# Altium PCB ADCS C2Sv0.1.PcbDoc (part 3 of 3)
Units mm, origin at the board's own origin, x right, y up, seen from the top; angles counter-clockwise.
Board outline 90 x 68 mm, 6 copper layers (SIG 1, GND 1, SIG 2, PWR, GND 2, SIG 3), stack 1.597 mm thick; 158 components, 104 nets, 588 pads, 339 vias.
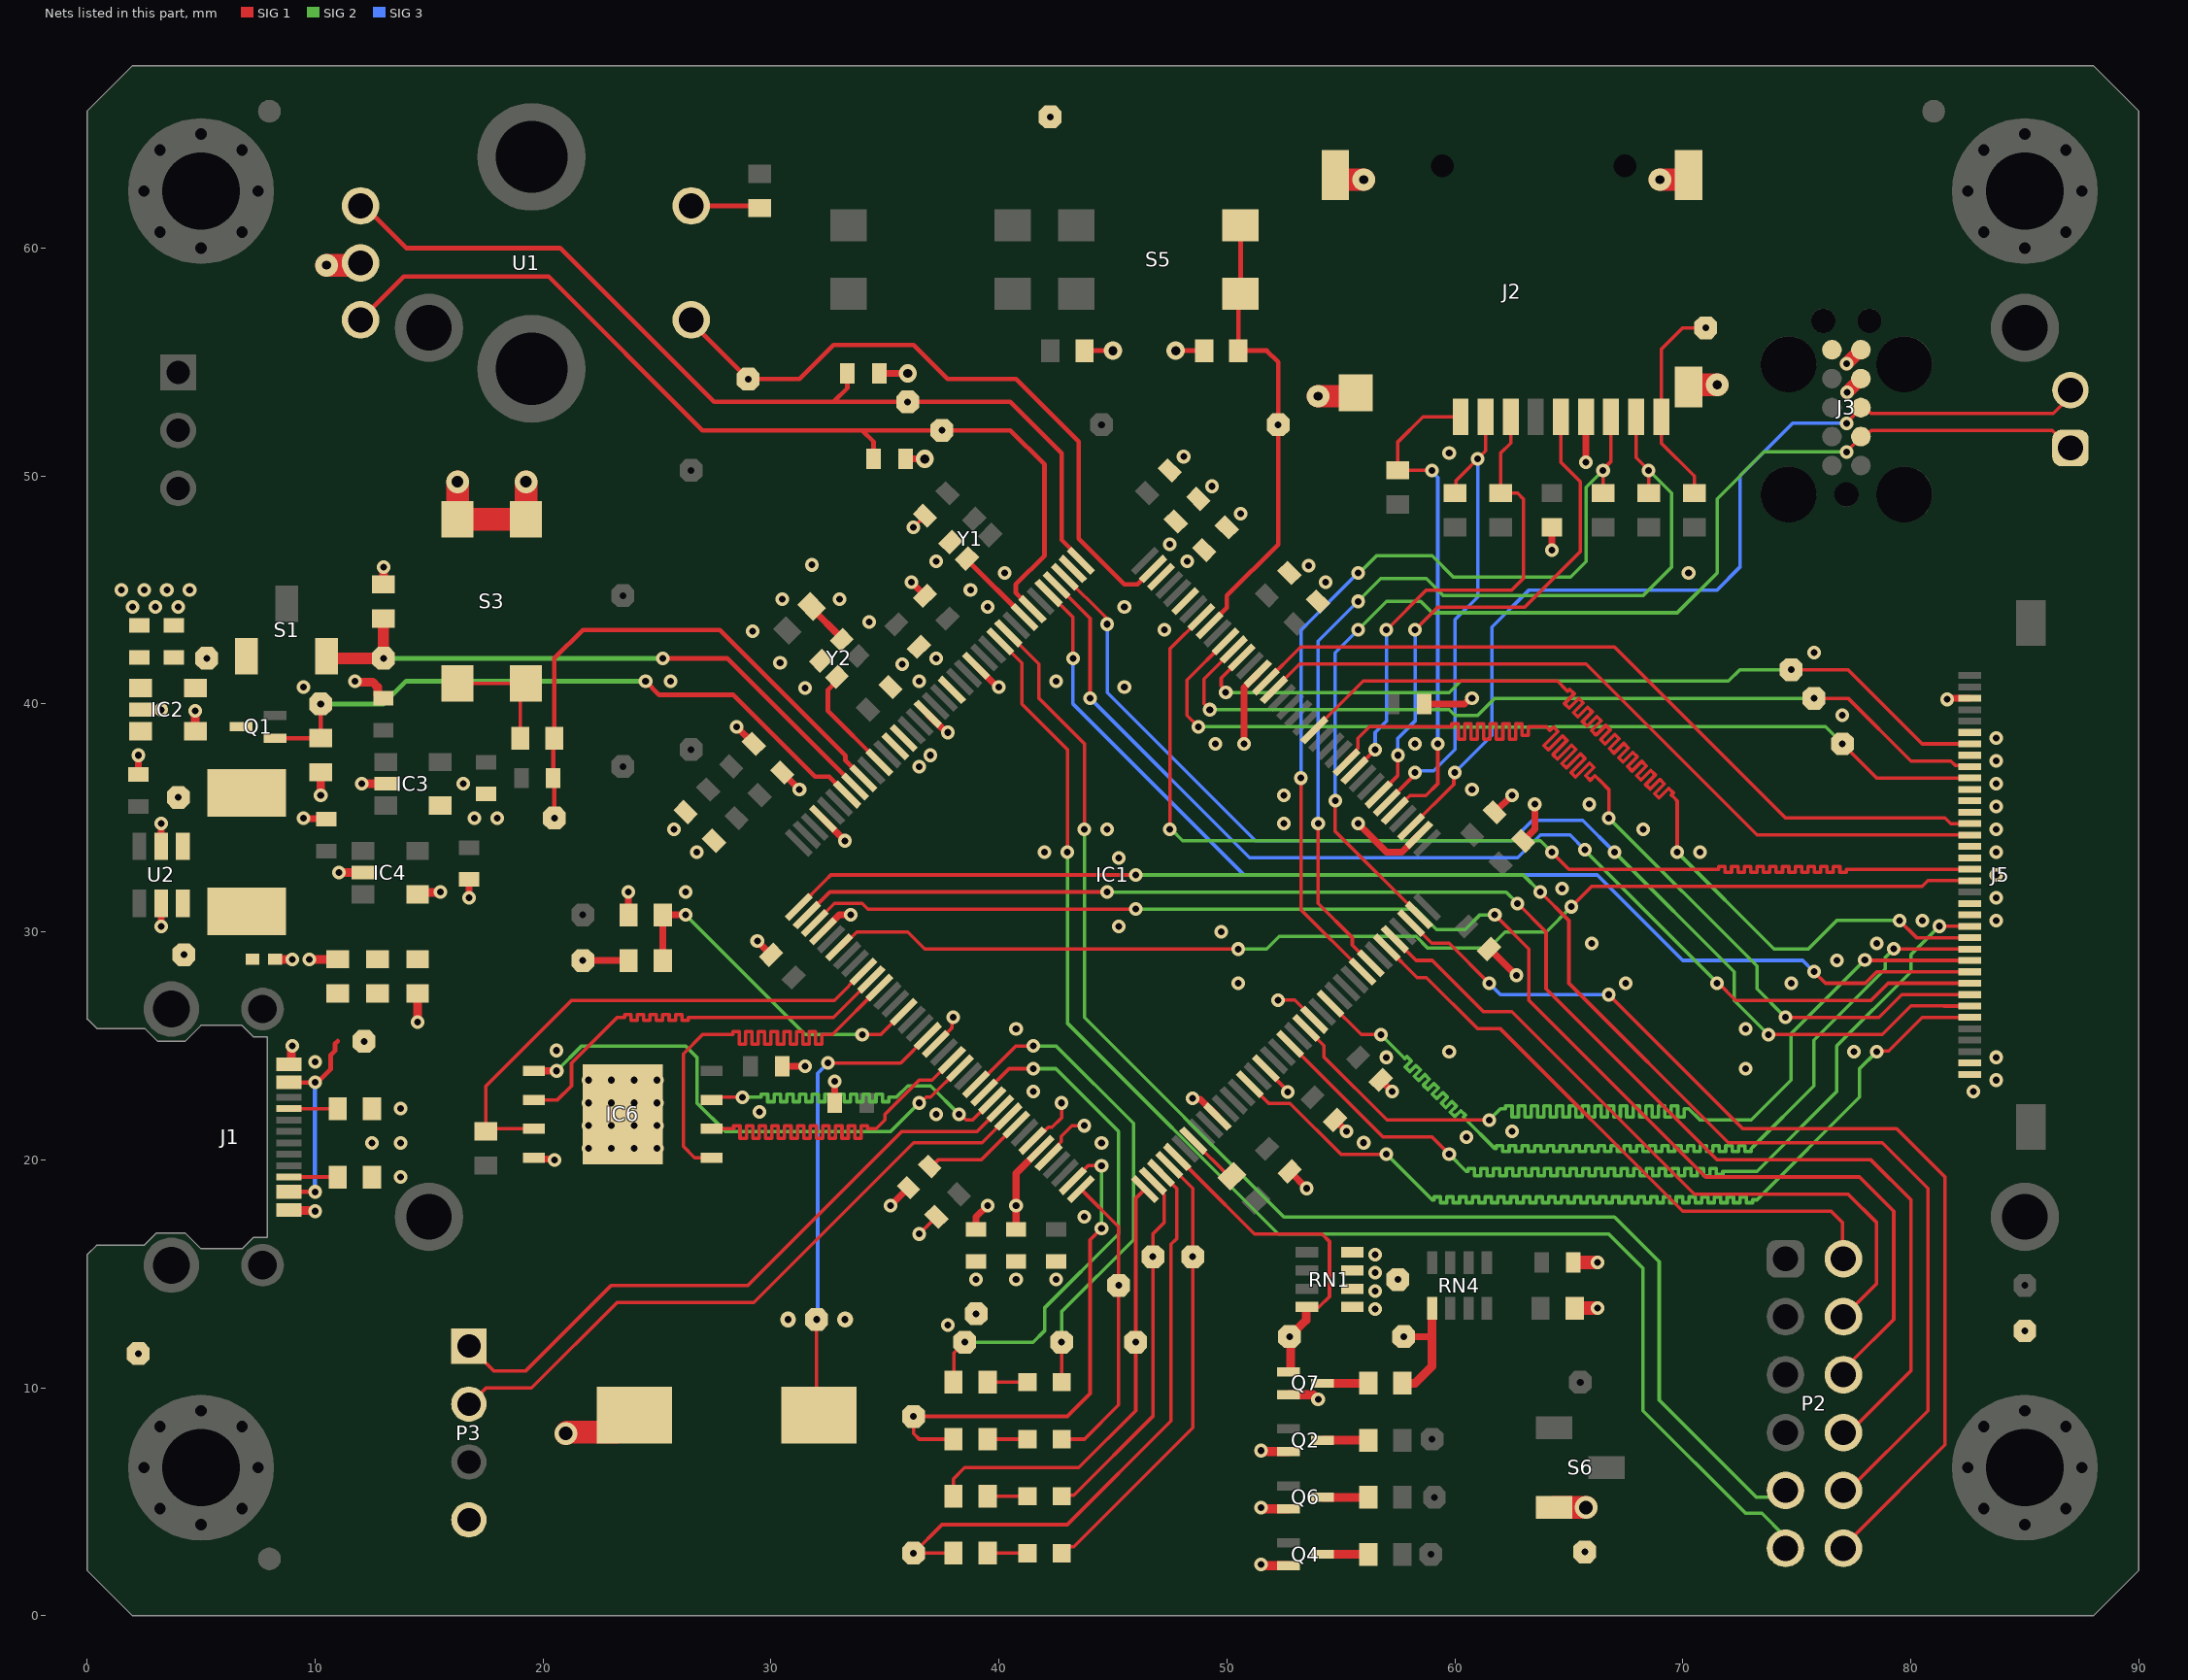
[diagram p6: the nets of this part, all layers, seen from the top]

## Via types
v1: diameter 0.6, hole 0.3, SIG 1 to SIG 3, tented both sides, 317 vias
v2: diameter 0.8, hole 0.4, SIG 1 to SIG 3, tented both sides, 9 vias
v3: diameter 1, hole 0.4, SIG 1 to SIG 3, tented both sides, 5 vias
v4: diameter 1, hole 0.5, SIG 1 to SIG 3, tented both sides, 3 vias
v5: diameter 1, hole 0.6, SIG 1 to SIG 3, tented both sides, 3 vias
v6: diameter 0.7, hole 0.3, SIG 1 to SIG 3, tented both sides, 2 vias

## Nets (pads, with @x,y where several pads share a name; then routed paths per layer and width w, separated by ;. In a path a pad name is that pad's centre, name@x,y a point inside that pad or via, vN(x,y) a via of type N, cw(c..) or ccw(c..) an arc to the next point about the centre after c; other vN are vias at no path point) (continued)
DCMI_D3: IC1.86 J5.6 | length 50.4
  SIG 1 w0.152: IC1.86@51.002,23.316 51.835,22.483 52.767,22.483 55,20.25 v1(57,20.25) ; v1(78.5,24.75) 78.529,24.779 79.029,24.779 80.502,26.252 82.573,26.252 J5.6@82.575,26.25
  SIG 2 w0.152: v1(57,20.25) 59,18.25 59.014,18.25 59.09,18.25 59.09,18.377 59.369,18.377 59.369,18.123 59.649,18.123 59.649,18.377 59.928,18.377 59.928,18.123 60.208,18.123 60.208,18.377 60.487,18.377 60.487,18.123 60.766,18.123 60.766,18.377 61.046,18.377 61.046,18.123 61.325,18.123 61.325,18.377 61.605,18.377 61.605,18.123 61.884,18.123 61.884,18.377 62.163,18.377 62.163,18.123 62.443,18.123 62.443,18.377 62.722,18.377 62.722,18.123 63.002,18.123 63.002,18.377 63.281,18.377 63.281,18.123 63.56,18.123 63.56,18.377 63.84,18.377 63.84,18.123 64.119,18.123 64.119,18.377 64.399,18.377 64.399,18.123 64.678,18.123 64.678,18.377 64.957,18.377 64.957,18.123 65.237,18.123 65.237,18.377 65.516,18.377 65.516,18.123 65.796,18.123 65.796,18.377 66.075,18.377 66.075,18.123 66.354,18.123 66.354,18.377 66.634,18.377 66.634,18.123 66.913,18.123 66.913,18.377 67.193,18.377 67.193,18.123 67.472,18.123 67.472,18.377 67.751,18.377 67.751,18.123 68.031,18.123 68.031,18.377 68.31,18.377 68.31,18.123 68.59,18.123 68.59,18.377 68.869,18.377 68.869,18.123 69.148,18.123 69.148,18.377 69.428,18.377 69.428,18.123 69.707,18.123 69.707,18.377 69.987,18.377 69.987,18.123 70.266,18.123 70.266,18.377 70.545,18.377 70.545,18.123 70.825,18.123 70.825,18.377 71.104,18.377 71.104,18.123 71.384,18.123 71.384,18.377 71.663,18.377 71.663,18.123 71.942,18.123 71.942,18.377 72.222,18.377 72.222,18.123 72.501,18.123 72.501,18.377 72.781,18.377 72.781,18.123 73.06,18.123 73.06,18.25 73.25,18.25 77.75,22.75 77.75,24 v1(78.5,24.75)
DCMI_D4: IC1.3 J5.7 | length 51.9
  SIG 1 w0.152: IC1.3@42.887,45.573 42.907,45.573 44.664,43.816 44.664,43.586 v1(44.75,43.5) ; v1(73.75,25.5) 78.75,25.5 80.006,26.756 81.458,26.756 81.465,26.75 J5.7@82.575,26.75
  SIG 2 w0.152: v1(67,33.5) 72.25,28.25 72.25,27 v1(73.75,25.5)
  SIG 3 w0.152: v1(44.75,43.5) 44.75,40.5 51.25,34 62.5,34 63.4,34.9 65.6,34.9 v1(67,33.5)
DCMI_D5: IC1.119 J5.8 | length 51
  SIG 1 w0.152: IC1.119@55.245,37.441 55.245,37.546 55.75,38.051 55.75,38.5 56.25,39 59.791,39 59.867,39 59.867,39.127 60.147,39.127 60.147,38.458 60.426,38.458 60.426,39.127 60.706,39.127 60.706,38.458 60.985,38.458 60.985,39.127 61.264,39.127 61.264,38.458 61.544,38.458 61.544,39.127 61.823,39.127 61.823,38.458 62.103,38.458 62.103,39.127 62.382,39.127 62.382,38.458 62.661,38.458 62.661,39.127 62.941,39.127 62.941,38.622 63.22,38.622 63.22,39 63.5,39 64,39 64.112,38.888 64.166,38.834 64.324,38.992 64.522,38.795 63.905,38.177 64.102,37.98 64.719,38.597 64.917,38.4 64.3,37.782 64.497,37.585 65.115,38.202 65.312,38.005 64.695,37.387 64.892,37.19 65.51,37.807 65.707,37.609 65.09,36.992 65.287,36.794 65.905,37.412 66.102,37.214 65.738,36.85 65.935,36.652 66.142,36.858 66.384,36.616 66.75,36.25 v1(66.75,35) ; v1(74.5,26.25) 78.598,26.25 79.596,27.248 82.573,27.248 J5.8@82.575,27.25
  SIG 2 w0.152: v1(66.75,35) 73.25,28.5 73.25,27.5 v1(74.5,26.25)
DCMI_D6: IC1.4 J5.9 | length 50.8
  SIG 1 w0.152: IC1.4@42.534,45.219 IC1.4@42.534,45.219 44,43.751 v1(44,40.25) ; v1(71.5,27.747) 71.566,27.747 72.313,27 78.25,27 79,27.75 J5.9@82.575,27.75
  SIG 2 w0.152: v1(65.7,33.6) 65.7,33.573 71.5,27.773 v1(71.5,27.747)
  SIG 3 w0.152: v1(44,40.25) 51,33.25 62.75,33.25 63.75,34.25 65.05,34.25 v1(65.7,33.6)
DCMI_D7: IC1.5 J5.10 | length 49.9
  SIG 1 w0.152: IC1.5@42.18,44.866 43.25,43.796 v1(43.25,42) ; v1(75.75,28.253) 76.253,27.75 77.998,27.75 78.5,28.252 82.573,28.252 J5.10@82.575,28.25
  SIG 3 w0.152: v1(43.25,42) 43.25,40 50.75,32.5 66.25,32.5 70,28.75 75.253,28.75 v1(75.75,28.253)
DCMI_D8: IC1.93 J5.11 | length 49.5
  SIG 1 w0.152: IC1.93@53.477,25.791 54.259,25.009 54.259,24.509 57.018,21.75 v1(61.5,21.75) ; v1(77.981,28.769) 78,28.75 J5.11@82.575,28.75
  SIG 2 w0.152: v1(61.5,21.75) 62,22.25 62.151,22.25 62.227,22.25 62.227,22.377 62.507,22.377 62.507,21.878 62.786,21.878 62.786,22.377 63.065,22.377 63.065,21.878 63.345,21.878 63.345,22.377 63.624,22.377 63.624,21.878 63.904,21.878 63.904,22.377 64.183,22.377 64.183,21.878 64.462,21.878 64.462,22.377 64.742,22.377 64.742,21.878 65.021,21.878 65.021,22.377 65.301,22.377 65.301,21.878 65.58,21.878 65.58,22.377 65.859,22.377 65.859,21.878 66.139,21.878 66.139,22.377 66.418,22.377 66.418,21.878 66.698,21.878 66.698,22.377 66.977,22.377 66.977,21.878 67.256,21.878 67.256,22.377 67.536,22.377 67.536,21.878 67.815,21.878 67.815,22.377 68.095,22.377 68.095,21.878 68.374,21.878 68.374,22.377 68.653,22.377 68.653,21.878 68.933,21.878 68.933,22.377 69.212,22.377 69.212,21.878 69.492,21.878 69.492,22.377 69.771,22.377 69.771,21.878 70.05,21.878 70.05,22.25 70.218,22.25 70.25,22.25 70.75,21.75 73,21.75 74.75,23.5 74.75,25.538 v1(77.981,28.769)
DCMI_D9: IC1.96 J5.12 | length 50.7
  SIG 1 w0.152: IC1.96@54.537,26.852 55.889,25.5 v1(56.75,25.5) ; v1(79.25,29.253) 79.253,29.25 J5.12@82.575,29.25
  SIG 2 w0.152: v1(56.75,25.5) 57.75,24.5 57.804,24.446 57.894,24.536 58.091,24.338 57.823,24.07 58.02,23.872 58.289,24.141 58.486,23.943 58.218,23.675 58.416,23.477 58.684,23.746 58.882,23.548 58.613,23.28 58.811,23.082 59.079,23.351 59.277,23.153 59.008,22.885 59.206,22.687 59.474,22.955 59.672,22.758 59.403,22.489 59.601,22.292 59.869,22.56 60.067,22.363 59.798,22.094 59.996,21.897 60.264,22.165 60.462,21.968 60.372,21.878 60.436,21.814 61.744,20.506 61.75,20.5 61.82,20.5 61.82,20.627 62.1,20.627 62.1,20.373 62.379,20.373 62.379,20.627 62.659,20.627 62.659,20.373 62.938,20.373 62.938,20.627 63.217,20.627 63.217,20.373 63.497,20.373 63.497,20.627 63.776,20.627 63.776,20.373 64.056,20.373 64.056,20.627 64.335,20.627 64.335,20.373 64.614,20.373 64.614,20.627 64.894,20.627 64.894,20.373 65.173,20.373 65.173,20.627 65.453,20.627 65.453,20.373 65.732,20.373 65.732,20.627 66.011,20.627 66.011,20.373 66.291,20.373 66.291,20.627 66.57,20.627 66.57,20.373 66.85,20.373 66.85,20.627 67.129,20.627 67.129,20.373 67.408,20.373 67.408,20.627 67.688,20.627 67.688,20.373 67.967,20.373 67.967,20.627 68.247,20.627 68.247,20.373 68.526,20.373 68.526,20.627 68.805,20.627 68.805,20.373 69.085,20.373 69.085,20.627 69.364,20.627 69.364,20.373 69.644,20.373 69.644,20.627 69.923,20.627 69.923,20.373 70.202,20.373 70.202,20.627 70.482,20.627 70.482,20.373 70.761,20.373 70.761,20.627 71.041,20.627 71.041,20.373 71.32,20.373 71.32,20.627 71.599,20.627 71.599,20.373 71.879,20.373 71.879,20.627 72.158,20.627 72.158,20.373 72.438,20.373 72.438,20.627 72.717,20.627 72.717,20.373 72.996,20.373 72.996,20.5 73,20.5 73.075,20.575 75.75,23.25 75.75,25.25 78.876,28.376 78.876,28.879 v1(79.25,29.253)
DCMI_D10: IC1.123 J5.13 | length 50.2
  SIG 1 w0.152: IC1.123@53.83,38.855 55.978,41.003 64.497,41.003 64.892,40.608 64.946,40.554 65.036,40.643 65.234,40.446 64.808,40.02 65.005,39.822 65.431,40.248 65.629,40.051 65.203,39.625 65.4,39.427 65.826,39.853 66.024,39.656 65.598,39.229 65.795,39.032 66.222,39.458 66.419,39.26 65.993,38.834 66.19,38.637 66.617,39.063 66.814,38.865 66.388,38.439 66.586,38.242 67.012,38.668 67.209,38.47 66.783,38.044 66.981,37.846 67.407,38.273 67.605,38.075 67.178,37.649 67.376,37.451 67.802,37.878 68,37.68 67.573,37.254 67.771,37.056 68.197,37.482 68.395,37.285 67.969,36.859 68.166,36.661 68.592,37.087 68.79,36.89 68.364,36.463 68.561,36.266 68.987,36.692 69.185,36.495 68.759,36.068 68.956,35.871 69.383,36.297 69.58,36.099 69.49,36.01 69.608,35.892 69.75,35.75 v1(69.75,33.5) ; v1(79.5,30.5) 80.25,29.75 J5.13@82.575,29.75
  SIG 2 w0.152: v1(69.75,33.5) 74,29.25 75.5,29.25 76.75,30.5 v1(79.5,30.5)
DCMI_D11: IC1.91 J5.14 | length 50.9
  SIG 1 w0.152: IC1.91@52.77,25.084 56.854,21 59,21 v1(59.75,20.25) ; v1(81.25,30.253) 81.252,30.252 82.573,30.252 J5.14@82.575,30.25
  SIG 2 w0.152: v1(59.75,20.25) 60.5,19.5 60.576,19.5 60.576,19.627 60.856,19.627 60.856,19.305 61.135,19.305 61.135,19.627 61.414,19.627 61.414,19.305 61.694,19.305 61.694,19.627 61.973,19.627 61.973,19.305 62.253,19.305 62.253,19.627 62.532,19.627 62.532,19.305 62.811,19.305 62.811,19.627 63.091,19.627 63.091,19.305 63.37,19.305 63.37,19.627 63.65,19.627 63.65,19.305 63.929,19.305 63.929,19.627 64.208,19.627 64.208,19.305 64.488,19.305 64.488,19.627 64.767,19.627 64.767,19.305 65.047,19.305 65.047,19.627 65.326,19.627 65.326,19.305 65.605,19.305 65.605,19.627 65.885,19.627 65.885,19.305 66.164,19.305 66.164,19.627 66.444,19.627 66.444,19.305 66.723,19.305 66.723,19.627 67.002,19.627 67.002,19.305 67.282,19.305 67.282,19.627 67.561,19.627 67.561,19.305 67.841,19.305 67.841,19.627 68.12,19.627 68.12,19.305 68.399,19.305 68.399,19.627 68.679,19.627 68.679,19.305 68.958,19.305 68.958,19.627 69.238,19.627 69.238,19.305 69.517,19.305 69.517,19.627 69.796,19.627 69.796,19.305 70.076,19.305 70.076,19.627 70.355,19.627 70.355,19.305 70.635,19.305 70.635,19.627 70.914,19.627 70.914,19.305 71.193,19.305 71.193,19.627 71.473,19.627 71.473,19.36 71.752,19.36 71.752,19.5 73.226,19.5 73.25,19.5 76.75,23 76.75,25 80,28.25 80,29.003 v1(81.25,30.253)
DCMI_HSYNC: IC1.42 J5.18 | length 51.8
  SIG 1 w0.152: IC1.42@32.988,29.327 33.092,29.327 33.766,30 36,30 36.75,29.25 v1(50.5,29.25) ; v1(65.106,31.106) 66,32 80.5,32 80.75,32.25 J5.18@82.575,32.25
  SIG 2 w0.152: v1(50.5,29.25) 51.747,29.25 52.297,29.8 58.3,29.8 58.8,29.3 61.5,29.3 62.203,30.003 64.003,30.003 v1(65.106,31.106)
DCMI_VSYNC: IC1.137 J5.19 | length 50.8
  SIG 1 w0.152: v1(47.5,34.5) 47.5,39.763 47.5,42.425 IC1.137@48.881,43.805 ; v1(64.25,33.503) 65.003,32.75 71.5,32.75 71.576,32.75 71.576,32.877 71.856,32.877 71.856,32.623 72.135,32.623 72.135,32.877 72.414,32.877 72.414,32.623 72.694,32.623 72.694,32.877 72.973,32.877 72.973,32.623 73.253,32.623 73.253,32.877 73.532,32.877 73.532,32.623 73.811,32.623 73.811,32.877 74.091,32.877 74.091,32.623 74.37,32.623 74.37,32.877 74.65,32.877 74.65,32.623 74.929,32.623 74.929,32.877 75.208,32.877 75.208,32.623 75.488,32.623 75.488,32.877 75.767,32.877 75.767,32.623 76.047,32.623 76.047,32.877 76.326,32.877 76.326,32.623 76.605,32.623 76.605,32.877 76.885,32.877 76.885,32.623 77.164,32.623 77.164,32.75 77.304,32.75 J5.19@82.575,32.75
  SIG 2 w0.152: v1(47.5,34.5) 47.563,34.5 48.063,34 63.753,34 v1(64.25,33.503)
DEBUG_DRAIN: "DBG DRN.TP" D9.A RN4.5 | length 5.4
  SIG 1 w0.3: 57.75,12.25 58.975,12.25 59,12.225
  SIG 1 w0.381: D9.A@57.7,10.2 58.25,10.2 59,10.95 59,12.225 RN4.5@59,13.5
DEBUG_LED: "DGB LED.TP" IC1.77 Q7.1 RN1.7 | length 15.3
  SIG 1 w0.152: IC1.77@47.82,20.134 48.704,19.25 51.204,16.75 54.171,16.75 54.5,16.421 54.5,14 54.027,13.527 RN1.7@53.739,13.527
  SIG 1 w0.381: Q7.1@52.7,10.7 52.789,10.7 52.798,10.709 52.798,12.298 ; 52.75,12.25 53.477,12.977 53.477,13.515 53.511,13.55 53.715,13.55 RN1.7@53.5,13.55
GND: C1.2 C2.1 C3.1 C4.1 C5.2 C6.2 C7.2 C8.1 C9.1 C10.2 C11.2 C12.2 C13.2 C14.2 C15.2 C16.2 C17.2 C18.2 C19.2 C20.2 C21.1 C22.2 C23.1 C24.2 C25.2 C26.2 C27.2 C28.2 C29.2 C30.2 C31.2 C32.2 C33.2 C34.2 C35.2 C36.2 C38.2 C39.2 C40.2 C41.2 D1.1 GND.TP IC1.17 IC1.23 IC1.24 IC1.33 IC1.40 IC1.54 IC1.66 IC1.68 IC1.82 IC1.88 IC1.94 IC1.110 IC1.130 IC2.2 IC2.4 IC3.2 IC3.4 IC4.2 IC4.4 IC6.4 IC6.9 J1.A1 J1.B1 J2.6 J2.G1 J2.G2 J2.G3 J2.G4 J3.4 J3.5 J5.1 J5.2 J5.15 J5.16 J5.20 J5.21 J5.24 J5.25 J5.26 J5.29 J5.31 J5.34 LS1.2 P3.4 Q2.2 Q4.2 Q6.2 Q7.2 R1.2 R2.2 R4.2 R6.2 R11.2 R12.2 R19.1 R27.1 RN1.2 RN1.4 RN1.6 RN1.8 S3.1 S3.3 S6.3 U1.C1 U2.2 U2.5 Y1.2 Y2.2 | length 93.8
  SIG 1 w0.152: IC6.4@19.6,20.095 IC6.4@19.647,20.048 ; v1(36.25,47.75) C24.2@36.755,48.255 ; v1(36.5,16.75) 37.083,17.333 37.177,17.333 37.255,17.255 C34.2@37.255,17.505 ; IC1.54@37.23,25.084 37.933,25.787 37.933,26.183 v1(38,26.25) ; IC1.66@41.473,20.841 41.577,20.841 42.17,21.433 42.333,21.433 42.75,21.85 v1(42.75,22.5) ; IC1.68@42.18,20.134 42.18,20.238 42.735,20.794 42.735,21.034 43.201,21.5 v1(43.75,21.5) ; IC1.88@51.709,24.023 51.709,23.985 52.669,23.025 v1(52.669,22.986) ; v1(52.25,27) 52.26,27.01 52.978,27.01 53.83,26.157 IC1.94@53.83,26.145
  SIG 1 w0.2: R11.2@43.75,55.5 v2(45,55.5) ; v2(47.75,55.5) R12.2@49,55.5
  SIG 1 w0.3: C39.2@2.25,36.9 v1(2.25,37.75) ; v1(3.25,30.25) U2.2@3.25,31.25 ; U2.5@3.25,33.75 v1(3.25,34.75) ; v1(9.5,35) 9.525,34.975 10.475,34.975 C8.1@10.5,34.95 ; v1(16.75,31.5) C7.2@16.75,32.3 ; IC6.4@19.647,20.048 20.452,20.048 v1(20.5,20) ; R19.1@23.75,30.75 v1(23.75,31.75) ; v1(28.5,39) C10.2@29.25,38.25 ; v1(29.4,29.6) C17.2@30.005,28.995 ; C11.2@30.495,36.995 30.5,36.995 31.245,36.25 v1(31.25,36.25) ; C38.2@30.5,24.1 v1(31.5,24.1) ; IC1.40@32.281,30.034 32.997,30.75 33.497,30.75 v1(33.5,30.747) ; IC1.33@32.281,34.966 33.247,34 v1(33.25,34) ; C29.2@32.8,22.5 v1(32.8,23.45) ; C40.2@34.75,54.5 v2(36,54.5) ; C41.2@35.9,50.75 v2(36.75,50.75) ; v1(36.155,45.345) C33.2@36.76,44.74 ; v1(48.5,22.7) 48.538,22.662 48.828,22.662 IC1.82@49.588,21.902 ; C26.2@48.745,48.995 C26.2@48.795,48.995 ; v1(50.75,38.25) 50.75,40.725 IC1.130@51.355,41.33 ; C14.2@52.75,19.5 v1(53.5,18.75) ; C15.2@54.745,21.755 54.747,21.755 v1(55.25,21.253) v1(55.25,21.253) ; J2.G2@54.75,63.2 J2.G2@54.95,63 ; J2.G1@55.5,53.5 J2.G1@55.65,53.65 ; v1(55.75,34.75) 57,33.5 57.667,33.5 IC1.110@58.427,34.259 ; C16.2@56.745,23.505 v1(57.25,23) ; C19.2@58.65,40 60.419,40 60.669,40.25 v1(60.75,40.25) ; C32.2@61.495,29.255 61.52,29.255 62.675,28.1 v1(62.7,28.1) ; C18.2@61.745,35.245 v1(62.5,36) ; C28.2@62.995,33.995 63.5,34.5 v1(63.5,35.6) ; v1(64.25,46.75) C5.2@64.25,47.75 C5.2@64.25,47.778 ; v1(65.75,50.6) J2.6@65.75,52.6 ; v1(81.6,40.2) 81.654,40.2 81.704,40.25 J5.34@82.575,40.25
  SIG 1 w0.381: IC2.2@2.35,39.75 v1(3.25,39.75) ; IC2.4@4.75,38.8 v1(4.75,39.7) ; D1.1@8.25,28.8 v1(9,28.8) ; J1.A1@8.753,24.149 8.797,24.149 8.958,24.31 8.958,24.958 v1(9,25) ; J1.B1@9.05,17.75 9.075,17.775 9.975,17.775 v1(10,17.75) ; v1(9.75,28.8) C3.1@11,28.8 ; v1(10.25,36) R6.2@10.25,37 ; v1(11.05,32.6) IC4.2@12.1,32.6 ; v1(11.75,41) 11.792,40.958 12.522,40.958 12.745,40.735 12.745,40.38 12.875,40.25 C9.1@13,40.25 ; v1(12.05,36.5) IC3.2@13.1,36.5 ; R4.2@13,45.25 v1(13,46) ; v1(14.5,26.05) C4.1@14.5,27.3 ; IC4.4@14.5,31.65 14.577,31.727 15.477,31.727 v1(15.5,31.75)
  SIG 1 w0.4: v1(51.5,2.25) 51.527,2.25 51.577,2.2 Q4.2@52.7,2.2 ; v1(51.5,4.75) 51.527,4.75 51.577,4.7 Q6.2@52.7,4.7 ; v1(51.5,7.25) 51.527,7.25 51.577,7.2 Q2.2@52.7,7.2 ; Q7.2@52.7,9.7 53.773,9.7 53.973,9.5 v1(54,9.5)
  SIG 1 w0.6: C21.1@65.2,15.5 v1(66.25,15.5) ; R27.1@65.25,13.5 v1(66.25,13.5) ; v1(77.188,54.92) J3.5@77.808,55.54 ; v1(77.208,53.67) J3.4@77.808,54.27
  SIG 1 w1: v3(10.5,59.25) 11.9,59.25 U1.C1@12,59.35 ; v4(16.25,49.75) S3.1@16.25,48.1 S3.3@19.25,48.1 v4(19.25,49.75) ; v5(21,8) 21.05,8.05 23.25,8.05 LS1.2@24,8.8 ; v3(54,53.5) J2.G1@55.5,53.5 ; J2.G2@54.95,63 v3(56,63) ; S6.3@64.35,4.75 v5(65.75,4.75) ; v3(69,63) 70.15,63 70.25,63.1 J2.G3@70.25,63.2 ; J2.G4@70.25,53.9 70.35,54 v3(71.5,54)
  other v1: 37.75,12.75 56.5,13.45 56.5,14.25 39,14.75 40.75,14.75 42.5,14.75 56.5,15.05 56.5,15.85 43.75,17.5 13.75,19.25 22,20.5 23,20.5 24,20.5 25,20.5 12.5,20.75 13.75,20.75 44.5,20.75 56,20.753 60.5,21 62.5,21.25 22,21.5 23,21.5 24,21.5 25,21.5 37.25,22 29.5,22.1 13.75,22.25 22,22.5 23,22.5 24,22.5 25,22.5 41.5,23 82.75,23 22,23.5 23,23.5 24,23.5 25,23.5 83.75,23.5 72.75,24 10,24.3 57,24.5 83.75,24.5 59.75,24.75 77.5,24.75 20.6,24.8 40.75,25.75 72.75,25.75 50.5,27.75 67.5,27.75 74.75,27.75 76.75,28.75 66,29.5 78.5,29.5 49.75,30 45.25,30.25 80.5,30.5 83.75,30.5 83.75,31.5 26.25,31.75 64.7,31.9 83.75,32.5 45.25,33.25 26.75,33.5 42,33.5 70.75,33.5 83.75,33.5 25.75,34.5 44.75,34.5 68.25,34.5 83.75,34.5 52.5,34.75 17,35 18,35 83.75,35.5 65.9,35.6 52.5,36 60.75,36.25 16.5,36.5 83.75,36.5 36.5,37.25 83.75,37.5 37,37.75 49.5,38.25 58.25,38.25 83.75,38.5 77,39.5 31.5,40.7 9.5,40.75 45.5,40.75 25.6,41 36.5,41 42.5,41 35.75,41.75 30.4,41.8 37.25,42 75.75,42.25 29.2,43.2 47.25,43.25 34.3,43.6 2,44.25 3,44.25 4,44.25 39.5,44.25 45.5,44.25 30.5,44.6 33,44.6 1.5,45 2.5,45 3.5,45 4.5,45 38.75,45 54.323,45.335 40.25,45.75 70.25,45.75 53.585,46.073 31.8,46.1 37.25,46.25 50.6,48.35 49.35,49.55 48.1,50.85 59.75,51
  other v6: 30.75,13 33.25,13
"HSE IN": IC1.26 Y2.3 | length 4.8
  SIG 1 w0.2: Y2.3@32.894,41.187 32.894,41.025 32.5,40.631 32.5,39.697 IC1.26@34.755,37.441
I2C1_CLK: IC1.129 J5.23 | length 34.7
  SIG 1 w0.152: IC1.129@51.709,40.977 53.232,42.5 67,42.5 74.5,35 81.5,35 81.75,34.75 J5.23@82.575,34.75
I2C1_SDA: IC1.128 J5.22 | length 34.1
  SIG 1 w0.152: IC1.128@52.063,40.623 53.189,41.75 65.75,41.75 73.25,34.25 J5.22@82.575,34.25
I2C2_SCL: IC1.11 P2.11 | length 62.4
  SIG 1 w0.152: IC1.11@40.059,42.745 40.059,42.742 41,41.801 41,40 43,38 v1(43,33.5)
  SIG 2 w0.152: v1(43,33.5) 43,26 52.25,16.75 66.75,16.75 68.25,15.25 68.25,9 72.75,4.5 73.46,4.5 P2.11@74.46,3.5
I2C2_SDA: IC1.10 P2.9 | length 61.7
  SIG 1 w0.152: IC1.10@40.412,43.098 41.75,41.76 41.75,40.25 43.75,38.25 v1(43.75,34.5)
  SIG 2 w0.152: v1(43.75,34.5) 43.75,26.25 52.5,17.5 67,17.5 68.96,15.54 68.96,9.46 73.207,5.213 73.808,5.213 74.46,5.865 P2.9@74.46,6.04
LCD_SCL: IC1.62 P3.1 | length 28.5
  SIG 1 w0.152: P3.1@16.75,11.83 17.83,10.75 19.25,10.75 23,14.5 29,14.5 35.75,21.25 39.053,21.25 IC1.62@40.059,22.255
LCD_SDA: IC1.63 P3.2 | length 28.5
  SIG 1 w0.152: P3.2@17,9.5 17.5,10 19.5,10 23.25,13.75 29.25,13.75 36.25,20.75 39.26,20.75 IC1.63@40.412,21.902
"LSE IN": IC1.8 Y1.3 | length 3.6
  SIG 1 w0.22: Y1.3@38.591,46.384 38.591,46.334 IC1.8@41.119,43.805
MCU_LED_1: IC1.71 MLED1.TP R10.2 | length 22.5
  SIG 1 w0.152: R10.2@38,7.75 36.5,7.75 36.25,8 MLED1.TP@36.25,8.75 37.25,8.75 43,8.75 44,9.75 44,16.5 v1(44.5,17) ; IC1.71@43.241,19.073 43.917,19.75 v1(44.5,19.75)
  SIG 2 w0.152: v1(44.5,17) v1(44.5,19.75)
MCU_LED_2: D7.1 IC1.72 MLED2.TP | length 13.3
  SIG 1 w0.152: D7.1@42.75,7.75 43.75,7.75 45.25,9.25 45.25,14 45.25,17.064 IC1.72@43.594,18.72
NetC2_2: C2.2 IC2.1 IC2.3 R3.2 U2.4 V2.TP
NetC4_2: C4.2 D1.2 FB1.1 R3.1 U2.3 V1.TP
NetD2_2: D2.2 R8.2 | length 1.7
  SIG 1 w0.152: R8.2@39.5,5.25 D2.2@41.25,5.25
NetD3_K: D3.K Q2.3 | length 2
  SIG 1 w0.381: Q2.3@54.2,7.7 D3.K@56.2,7.7
NetD4_K: D4.K Q4.3 | length 2
  SIG 1 w0.381: Q4.3@54.2,2.7 D4.K@56.2,2.7
NetD5_K: D5.K Q6.3 | length 2
  SIG 1 w0.381: Q6.3@54.2,5.2 D5.K@56.2,5.2
NetD6_2: D6.2 R9.1 | length 1.7
  SIG 1 w0.152: R9.1@39.5,10.25 D6.2@41.25,10.25
NetD7_2: D7.2 R10.1 | length 1.7
  SIG 1 w0.152: R10.1@39.5,7.75 D7.2@41.25,7.75
NetD8_2: D8.2 R15.1 | length 1.7
  SIG 1 w0.152: R15.1@39.5,2.75 D8.2@41.25,2.75
NetD9_K: D9.K Q7.3 | length 2
  SIG 1 w0.381: Q7.3@54.2,10.2 D9.K@56.2,10.2
NetIC1_2: IC1.2
NetIC1_64: IC1.64 L1.1 | length 4.8
  SIG 1 w0.152: L1.1@36.828,19.578 36.911,19.578 37.333,20 39.218,20 IC1.64@40.766,21.548
NetIC1_79: IC1.79 R26.2 | length 2.3
  SIG 1 w0.152: IC1.79@48.527,20.841 50.088,19.28 R26.2@50.22,19.28
NetIC1_139: IC1.139
NetR13_2: R13.2 U1.D1 | length 3
  SIG 1 w0.2: U1.D1@26.5,61.85 29.4,61.85 R13.2@29.5,61.75
NetR16_2: R16.2 S3.2 S3.4 | length 5.5
  SIG 1 w0.152: S3.2@16.25,40.9 S3.4@19.25,40.9 19,40.65 R16.2@19,38.5
NetR17_2: R17.2 Y2.1 | length 2
  SIG 1 w0.152: R17.2@31.78,44.21 R17.2@31.78,44.28 ; Y2.1@33.106,42.813 Y2.1@33.106,42.884
  SIG 1 w0.3: R17.2@31.78,44.21 Y2.1@33.106,42.884
NetR18_1: R18.1 SENSOR_RST.TP | length 1.5
  SIG 1 w0.3: SENSOR_RST.TP@22,28.75 R18.1@23.5,28.75
NRST: C37.2 IC1.28 NRST.TP R16.1 | length 23.9
  SIG 1 w0.2: NRST.TP@20.5,35 20.5,36.7 C37.2@20.45,36.75 20.45,38.45 R16.1@20.5,38.5 20.5,42 21.75,43.25 27.75,43.25 33.266,37.734 33.266,37.516 IC1.28@34.048,36.734
OCTO_CLK: IC1.56 IC6.6 | length 23.1
  SIG 1 w0.152: IC6.6@27.4,21.365 28.288,21.365 28.364,21.365 28.364,21.492 28.644,21.492 28.644,20.947 28.923,20.947 28.923,21.492 29.203,21.492 29.203,20.947 29.482,20.947 29.482,21.492 29.761,21.492 29.761,20.947 30.041,20.947 30.041,21.492 30.32,21.492 30.32,20.947 30.6,20.947 30.6,21.492 30.879,21.492 30.879,20.947 31.158,20.947 31.158,21.492 31.438,21.492 31.438,20.947 31.717,20.947 31.717,21.492 31.997,21.492 31.997,20.947 32.276,20.947 32.276,21.492 32.555,21.492 32.555,20.947 32.835,20.947 32.835,21.492 33.114,21.492 33.114,20.947 33.394,20.947 33.394,21.492 33.673,21.492 33.673,20.947 33.952,20.947 33.952,21.492 34.232,21.492 34.232,21.365 34.495,21.365 34.615,21.365 35,21.75 35,22 36.5,23.5 37.061,23.5 IC1.56@37.937,24.377
OCTO_CS: IC1.57 IC6.1 | length 23
  SIG 1 w0.152: v1(36.5,22.5) 36.563,22.5 36.813,22.75 37.009,22.75 38.282,24.023 IC1.57@38.291,24.023
  SIG 1 w0.3: IC6.1@19.6,23.905 v1(20.601,23.905)
  SIG 2 w0.152: v1(20.601,23.905) 21.696,25 26.25,25 26.75,24.5 26.75,22.5 28,21.25 35.25,21.25 v1(36.5,22.5)
OCTO_IO0: IC1.47 IC6.5 | length 23.4
  SIG 1 w0.152: IC6.5@27.777,20.095 IC6.5@27.4,20.095 26.655,20.095 26.155,20.595 26.155,24.655 27,25.5 28.25,25.5 28.326,25.5 28.326,25.627 28.606,25.627 28.606,25.079 28.885,25.079 28.885,25.627 29.164,25.627 29.164,25.079 29.444,25.079 29.444,25.627 29.723,25.627 29.723,25.079 30.003,25.079 30.003,25.627 30.282,25.627 30.282,25.079 30.561,25.079 30.561,25.627 30.841,25.627 30.841,25.079 31.12,25.079 31.12,25.627 31.4,25.627 31.4,25.079 31.679,25.079 31.679,25.627 31.958,25.627 31.958,25.079 32.238,25.079 32.238,25.5 32.467,25.5 32.697,25.5 IC1.47@34.755,27.559
OCTO_IO1: IC1.46 IC6.2 | length 20.1
  SIG 1 w0.152: IC6.2@19.6,22.635 20.635,22.635 21.25,23.25 21.25,24.25 21.345,24.345 23.25,26.25 23.5,26.25 23.576,26.25 23.576,26.377 23.856,26.377 23.856,26.123 24.135,26.123 24.135,26.377 24.414,26.377 24.414,26.123 24.694,26.123 24.694,26.377 24.973,26.377 24.973,26.123 25.253,26.123 25.253,26.377 25.532,26.377 25.532,26.123 25.811,26.123 25.811,26.377 26.091,26.377 26.091,26.123 26.37,26.123 26.37,26.25 26.5,26.25 32.74,26.25 IC1.46@34.402,27.912
OCTO_IO2: IC1.45 IC6.3 R20.1 | length 22.6
  SIG 1 w0.152: IC6.3@19.6,21.365 17.5,21.365 17.5,23.25 21.25,27 32.782,27 IC1.45@34.048,28.266
OCTO_IO3: IC1.61 IC6.7 | length 20
  SIG 1 w0.152: IC6.7@27.4,22.635 27.515,22.75 v1(28.75,22.75) ; v1(38.25,22) 38.313,22 38.563,21.75 38.846,21.75 IC1.61@39.705,22.609
  SIG 2 w0.152: v1(28.75,22.75) 29.5,22.75 29.576,22.75 29.576,22.877 29.856,22.877 29.856,22.552 30.135,22.552 30.135,22.877 30.414,22.877 30.414,22.552 30.694,22.552 30.694,22.877 30.973,22.877 30.973,22.552 31.253,22.552 31.253,22.877 31.532,22.877 31.532,22.552 31.811,22.552 31.811,22.877 32.091,22.877 32.091,22.552 32.37,22.552 32.37,22.877 32.65,22.877 32.65,22.552 32.929,22.552 32.929,22.877 33.208,22.877 33.208,22.552 33.488,22.552 33.488,22.877 33.767,22.877 33.767,22.552 34.047,22.552 34.047,22.877 34.326,22.877 34.326,22.552 34.605,22.552 34.605,22.877 34.885,22.877 34.885,22.552 35.164,22.552 35.164,22.75 35.332,22.75 35.5,22.75 36,23.25 37,23.25 v1(38.25,22)
PWR_ACTION: IC1.30 PA.TP Q1.1 R6.1 | length 29.1
  SIG 1 w0.2: Q1.1@8.25,38.5 R6.1@10.25,38.5 PA.TP@10.25,40 ; v1(24.5,41) 25.1,40.4 28.35,40.4 31.941,36.809 32.559,36.809 IC1.30@33.341,36.027
  SIG 2 w0.2: PA.TP@10.25,40 13,40 14,41 v1(24.5,41)
PWR_STATE: IC1.29 PS.TP R4.1 S1.3 | length 27.3
  SIG 1 w0.2: v1(25.25,42) 28.075,42 IC1.29@33.695,36.381
  SIG 1 w0.5: S1.3@10.5,42.1 10.6,42 PS.TP@13,42 R4.1@13,43.75
  SIG 2 w0.2: PS.TP@13,42 v1(25.25,42)
R3V3: C1.1 IC2.5 Q1.3 R3V3.TP S1.1
READ_LED_1: IC1.73 R8.1 RLED1.TP | length 19.9
  SIG 1 w0.152: R8.1@38,5.25 38,6 38.5,6.5 43.5,6.5 46,9 46,11.75 46,18.314 IC1.73@46.406,18.72
READ_LED_2: D2.1 IC1.74 RLED2.TP | length 16.2
  SIG 1 w0.152: D2.1@42.75,5.25 42.789,5.289 43.289,5.289 46.75,8.75 RLED2.TP@46.75,15.75 46.75,16.75 47.25,17.25 47.25,18.478 46.759,18.969 IC1.74@46.759,19.073
RESETBAR: IC1.133 J5.28 RESETBAR.TP | length 37.8
  SIG 1 w0.152: v1(49.25,39.75) 49.25,39.763 49,40.013 49,41.096 IC1.133@50.295,42.391 ; RESETBAR.TP@76.25,40.25 77.25,40.25 80,37.5 81.75,37.5 81.953,37.297 82.528,37.297 J5.28@82.575,37.25
  SIG 2 w0.152: v1(49.25,39.75) 59.75,39.75 60.003,39.497 60.997,39.497 61.75,40.25 RESETBAR.TP@75.75,40.25
SCROLL_A: C40.1 IC1.1 SCROLL_A.TP U1.A1 | length 41.5
  SIG 1 w0.2: U1.A1@12.25,61.75 14,60 20.75,60 27.5,53.25 32.75,53.25 ; C40.1@33.35,54.5 33.35,53.85 32.75,53.25 ; IC1.1@43.594,46.28 43.594,46.351 42.75,47.195 42.75,51 40.5,53.25 SCROLL_A.TP@36,53.25 32.75,53.25
SCROLL_B: C41.1 IC1.7 SCROLL_B.TP U1.B1 | length 42.8
  SIG 1 w0.2: U1.B1@12,56.85 13.9,58.75 20.25,58.75 27,52 34,52 ; C41.1@34.5,50.75 34.5,51.5 34,52 ; IC1.7@41.473,44.159 40.738,44.894 40.738,45.238 42,46.5 42,50.5 40.5,52 SCROLL_B.TP@37.5,52 34,52
SCROLL_BUTTON: IC1.143 SCRLL_BTN.TP U1.E1 | length 29.1
  SIG 1 w0.2: U1.E1@26.5,56.85 26.5,56.75 SCRLL_BTN.TP@29,54.25 31.25,54.25 32.75,55.75 36.25,55.75 37.75,54.25 40.75,54.25 43.5,51.5 43.5,47.25 45.5,45.25 46.083,45.25 IC1.143@46.759,45.927
SD_CD: J2.CD1 R7.2 SD_CD.TP | length 9.2
  SIG 1 w0.152: R7.2@70.5,49.25 70.5,50 69.05,51.45 J2.CD1@69.05,52.6 69.05,55.55 70,56.5 SD_CD.TP@71,56.5
SDMMC1_CLK: IC1.115 J2.5 | length 22.8
  SIG 1 w0.152: IC1.115@56.659,36.027 57.5,36.868 v1(57.5,37.75) ; v1(58.25,43.25) 59.25,44.25 63.064,44.25 65.5,46.686 65.5,49.75 64.65,50.6 J2.5@64.65,52.6
  SIG 3 w0.152: v1(57.5,37.75) 57.5,38.5 58.25,39.25 v1(58.25,43.25)
SDMMC1_CMD: IC1.118 J2.3 R21.1 | length 21.8
  SIG 1 w0.152: IC1.118@55.598,37.098 55.603,37.098 56.5,37.995 v1(56.5,38) ; v1(57,43.25) 58.75,45 62.5,45 63,45.5 63,49 62.75,49.25 R21.1@62,49.25 62,51 62.45,51.45 J2.3@62.45,52.6
  SIG 3 w0.152: v1(56.5,38) 56.5,38.75 57,39.25 v1(57,43.25)
SDMMC1_DAT0: IC1.100 J2.7 R22.1 | length 38.4
  SIG 1 w0.152: v1(53.25,36.75) 53.25,30.968 IC1.100@55.952,28.266 ; R22.1@66.5,49.25 66.5,50.298 66.85,50.648 J2.7@66.85,52.6
  SIG 2 w0.152: v1(55.75,45.75) 55.813,45.75 56.563,46.5 59,46.5 59.931,45.569 65.069,45.569 65.75,46.25 65.75,49.5 v1(66.5,50.25)
  SIG 3 w0.152: v1(53.25,36.75) 53.25,43.25 v1(55.75,45.75)
SDMMC1_DAT1: IC1.101 J2.8 R23.1 | length 40.8
  SIG 1 w0.152: v1(54,34.75) 54,31.25 55.5,29.75 55.5,29.425 IC1.101@56.305,28.619 ; J2.8@67.95,52.6 67.95,50.8 v1(68.5,50.25) R23.1@68.5,49.25
  SIG 2 w0.152: v1(55.75,44.5) 56.75,45.5 58.75,45.5 59.5,44.75 68.25,44.75 69.5,46 69.5,49.25 v1(68.5,50.25)
  SIG 3 w0.152: v1(54,34.75) 54,42.75 v1(55.75,44.5)
SDMMC1_DAT2: IC1.113 J2.1 R24.1 | length 22.2
  SIG 1 w0.152: IC1.113@57.366,35.32 58.023,35.977 58.727,35.977 59.25,36.5 v1(59.25,38.25) ; v1(59,50.25) R24.1@57.5,50.25 57.5,51.5 58.6,52.6 J2.1@60.25,52.6
  SIG 3 w0.152: v1(59,50.25) 59,50.187 59.25,49.937 v1(59.25,38.25)
SDMMC1_DAT3: IC1.114 J2.2 R25.1 | length 21.1
  SIG 1 w0.152: IC1.114@57.012,35.673 58.25,36.911 v1(58.25,37) ; R25.1@60,49.25 60.039,49.289 60.039,49.789 61.35,51.1 J2.2@61.35,52.6
  SIG 3 w0.152: v1(58.25,37) 58.317,37.067 59.067,37.067 60,38 60,43.699 61,44.699 v1(61,50.75)
SENSOR_LED_1: IC1.60 R9.2 SLED1.TP | length 23.5
  SIG 1 w0.152: R9.2@38,10.25 38.024,10.274 38.024,11.524 SLED1.TP@38.725,12.225 ; IC1.60@39.352,22.963 39.407,22.963 40.445,24 v1(41.5,24)
  SIG 2 w0.152: SLED1.TP@38.556,12 41.5,12 42,12.5 42,13.5 45.25,16.75 45.25,21.25 42.5,24 v1(41.5,24)
SENSOR_LED_2: D6.1 IC1.59 SLED2.TP | length 21.7
  SIG 1 w0.152: IC1.59@38.998,23.316 39.066,23.316 40.75,25 v1(41.5,25) ; D6.1@42.75,10.25 SLED2.TP@42.75,12
  SIG 2 w0.152: v1(41.5,25) 42.5,25 45.9,21.6 45.9,16.5 42.75,13.35 SLED2.TP@42.75,12
SENSOR_RST_TP: IC1.50 R18.2 R19.2 | length 15.2
  SIG 1 w0.152: v1(34,25.5) 34.818,25.5 IC1.50@35.816,26.498
  SIG 1 w0.3: R18.2@25.25,28.75 R19.2@25.25,30.75 v1(26.25,30.75)
  SIG 2 w0.152: v1(26.25,30.75) 31.5,25.5 v1(34,25.5)
SHUTTER: IC1.136 R12.1 S5.2 S5.4 SHUTTER.TP | length 20.2
  SIG 1 w0.2: IC1.136@49.234,43.452 50,44.218 50,44.75 52.25,47 SHUTTER.TP@52.25,52.25 52.25,55 51.75,55.5 R12.1@50.5,55.5 50.5,57.9 S5.2@50.6,58 50.6,60.8 S5.4@50.5,60.9
"SPI1 CLK": IC1.106 P2.12 | length 46
  SIG 1 w0.152: IC1.106@58.073,30.387 58.093,30.387 58.98,29.5 59.75,29.5 v1(61.5,27.75) ; v1(66.75,27.25) 72.625,21.375 79.375,21.375 81.5,19.25 81.5,7.5 77.489,3.489 77.011,3.489 P2.12@77,3.5
  SIG 3 w0.152: v1(61.5,27.75) 62,27.25 v1(66.75,27.25)
"SPI1 MOSI": IC1.37 P2.10 | length 72.3
  SIG 1 w0.152: IC1.37@31.22,31.094 32.376,32.25 32.626,32.5 v1(46,32.5) ; v1(63.75,31.75) 65,30.5 65,27.75 72,20.75 78.75,20.75 80.75,18.75 80.75,9 77.25,5.5 P2.10@77.04,5.5
  SIG 2 w0.152: v1(46,32.5) 63,32.5 v1(63.75,31.75)
STANDBY: IC1.132 J5.30 STANDBY.TP | length 36.4
  SIG 1 w0.152: v1(49.951,40.506) 49.951,40.6 49.75,40.801 49.75,41.139 IC1.132@50.648,42.037 ; STANDBY.TP@74.75,41.5 77.25,41.5 80.5,38.25 J5.30@82.575,38.25
  SIG 2 w0.152: v1(49.951,40.506) 49.954,40.503 59.753,40.503 60.253,41.003 72.003,41.003 72.5,41.5 STANDBY.TP@74.75,41.5
SWDCLK_TAG: IC1.111 J3.3 P1.2 | length 42.7
  SIG 1 w0.152: IC1.111@58.073,34.613 58.093,34.613 59.951,36.471 59.951,36.951 v1(60,37) ; v1(77.18,52.316) 77.18,52.344 77.808,52.972 J3.3@77.808,53 78,53 78.25,52.75 86.25,52.75 87,53.5 P1.2@87,53.77
  SIG 3 w0.152: v1(60,37) 61.625,38.625 61.625,43.375 63.25,45 71.5,45 72.5,46 72.5,50 74.816,52.316 v1(77.18,52.316)
SWDIO_TAG: IC1.107 J3.2 P1.1 | length 52
  SIG 1 w0.152: v1(54.75,35.75) 54.75,34.417 IC1.107@58.427,30.741 ; v1(77.191,51.057) 77.191,51.085 77.808,51.702 J3.2@77.808,51.73 77.982,51.73 78.252,52 86.207,52 86.977,51.23 P1.1@87,51.23
  SIG 2 w0.152: v1(55.75,43.25) 57,44.5 58.5,44.5 59,44 69.75,44 71.5,45.75 71.5,49 73.557,51.057 v1(77.191,51.057)
  SIG 3 w0.152: v1(54.75,35.75) 54.75,42.25 v1(55.75,43.25)
SWO_TAG: J3.6
TIM1_CH1: IC1.53 LS1.1 TIM1.TP | length 20.6
  SIG 1 w0.152: LS1.1@32,8.8 TIM1.TP@32,13 ; v1(32.5,24.25) 35.689,24.25 IC1.53@36.877,25.437
  SIG 1 w0.6: LS1.1@32,8.8 LS1.1@32.05,8.75
  SIG 3 w0.152: TIM1.TP@32.05,13 32.05,23.8 v1(32.5,24.25)
TRIGGER: IC1.134 J5.27 TRIGGER.TP | length 39.4
  SIG 1 w0.152: v1(48.75,39) 48.25,39.5 48.25,41.053 IC1.134@49.941,42.745 ; TRIGGER.TP@77,38.25 78.5,36.75 J5.27@82.575,36.75
  SIG 2 w0.152: v1(48.75,39) 56.671,39 56.678,38.994 64.393,38.994 64.399,39 76.25,39 TRIGGER.TP@77,38.25
USART1_RX: IC1.104 P2.4 | length 31
  SIG 1 w0.152: IC1.104@57.366,29.68 58.296,28.75 59,28.75 61.25,26.5 62.5,26.5 70.5,18.5 77.25,18.5 78.5,17.25 78.5,14.58 P2.4@77.04,13.12
USART1_TX: IC1.103 P2.2 | length 26
  SIG 1 w0.152: IC1.103@57.012,29.327 58.339,28 58.75,28 61,25.75 62,25.75 70,17.75 76.5,17.75 77,17.25 P2.2@77,16.2
USART2_RX: IC1.39 P2.6 | length 62.9
  SIG 1 w0.152: IC1.39@31.927,30.387 32.79,31.25 34,31.25 34.25,31 v1(46,31) ; v1(61.75,30.75) 63.247,29.253 63.247,27.003 71,19.25 77.75,19.25 79.25,17.75 79.25,13 77.37,11.12 P2.6@77,11.12
  SIG 2 w0.152: v1(46,31) 58.3,31 59.2,30.1 60.45,30.1 61.1,30.75 v1(61.75,30.75)
USART2_TX: IC1.38 P2.8 | length 67.5
  SIG 1 w0.152: IC1.38@31.573,30.741 32.586,31.753 44.747,31.753 v1(44.75,31.75) ; v1(62.75,31.25) 64,30 64,27.5 71.5,20 78.25,20 80,18.25 80,10.75 77.29,8.04 P2.8@77.04,8.04
  SIG 2 w0.152: v1(44.75,31.75) 62.25,31.75 v1(62.75,31.25)
USB_CC1: J1.A5 R1.1 | length 2.4
  SIG 1 w0.152: J1.A5@8.85,22.25 R1.1@11.215,22.25
USB_CC2: J1.B5 R2.1 | length 2.1
  SIG 1 w0.152: J1.B5@8.85,19.25 R2.1@11,19.25
VBUS: C3.2 FB1.2 J1.A4 J1.B4 VBUS.TP | length 9.7
  SIG 1 w0.2: J1.B4@8.65,18.8 J1.B4@8.85,18.6 v1(10,18.6) ; J1.A4@8.85,23.4 10.108,23.4 10.691,23.983 10.691,24.6 10.877,24.786 10.877,25.088 11,25.211
  SIG 3 w0.2: v1(10,18.6) v1(10,23.4)
VDDCORE: C22.1 C25.1 C26.1 C27.1 IC1.14 IC1.20 IC1.67 IC1.142 L1.2 VDDCORE.TP | length 8.9
  SIG 1 w0.3: v1(35.25,18) L1.2@36.033,18.783 ; IC1.20@36.877,39.563 37.689,38.75 v1(37.75,38.75) ; IC1.14@38.998,41.684 39.932,40.75 v1(40,40.75) ; C22.1@39,16.95 39,17.5 v1(39.5,18) ; C25.1@40.75,16.95 v1(40.75,18) 40.75,19.411 IC1.67@41.827,20.488
  other v1: 48.25,46.25 47.5,47
WRITE_LED_1: IC1.75 R15.2 WLED1.TP | length 26.7
  SIG 1 w0.152: R15.2@38,2.75 WLED1.TP@36.25,2.75 37.5,4 38.5,4 43,4 47.546,8.546 47.546,16.296 47.796,16.546 47.796,18.744 IC1.75@47.113,19.427
WRITE_LED_2: D8.1 IC1.76 WLED2.TP | length 20
  SIG 1 w0.152: D8.1@42.75,2.75 43.034,3.034 43.284,3.034 48.5,8.25 48.5,18.747 IC1.76@47.466,19.781
pads on no net: *.3 IC1.9 IC1.12 IC1.15 IC1.16 IC1.18 IC1.19 IC1.21 IC1.22 IC1.27 IC1.32 IC1.36 IC1.43 IC1.48 IC1.49 IC1.51 IC1.52 IC1.58 IC1.70 IC1.78 IC1.80 IC1.87 IC1.90 IC1.92 IC1.102 IC1.105 IC1.112 IC1.116 IC1.117 IC1.120 IC1.121 IC1.124 IC1.125 IC1.126 IC1.127 IC1.135 IC1.140 J1.A6 J1.A7 J1.A8 J1.B6 J1.B7 J1.B8 J1.MH1 J1.MH2 J1.MH3 J1.MH4 J2.MH1 J2.MH2 J3.7 J3.8 J3.9 J3.10 J3.11 J3.12 J3.13 J3.14 J3.15 J3.16 J3.17 J5.MP1 J5.MP2 MNT1.1 MNT2.1 MNT3.1 MNT4.1 U1.MH1 U1.MH2

## Polygon pours and split planes (outlines as drawn)
GND on SIG 1 "GND_L01_P052" (solid, pour order 52): 39.625,43.125 34.75,48 36.75,50 41.625,45.125
3V3 on SIG 1 "3V3_L01_P051" (solid, pour order 51): 39.625,46.375 41.5,48.25 38.625,51.125 36.75,49.25
GND on SIG 1 "GND_L01_P043" (solid, pour order 43): 33.125,39.625 36.5,36.25 37.875,37.625 36.875,38.625 39,40.75 36.625,43.125
VDDCORE on SIG 1 "VDDCORE_L01_P042" (solid, pour order 42): 47.5,44.25 49.75,46.5 47.5,48.75 46.75,48 46.75,47 45.75,46
3V3 on SIG 1 "3V3_L01_P039" (solid, pour order 39): 51.75,45.5 53.75,43.5 50.875,40.625 48.75,42.75
1V8 on SIG 1 "1V8_L01_P023" (solid, pour order 23): 32,33.5 32.75,34.25 31.25,35.75 30.75,35.75 28.25,38.25 26.25,36.25 29.125,33.375 30.5,34.75 30.75,34.75
GND on SIG 1 "GND_L01_P032" (solid, pour order 32): 82,25 82,22.5 84.25,22.5 84.25,25
GND on SIG 1 "GND_L01_P030" (solid, pour order 30): 82,39.1 82,30 84.5,30 84.5,39.1
GND on SIG 1 "GND_L01_P047" (solid, pour order 47): 15.5,34.5 18.5,34.5 18.5,37 15.5,37
R3V3 on SIG 1 "R3V3_L01_P034" (solid, pour order 34): 7.5,37.5 7.5,42.75 3,42.75 3,37.5
NetC2_2 on SIG 1 "NETC2_2_L01_P033" (solid, pour order 33): 3.5,32.75 3.5,35 2.75,35 2.75,35.75 1,35.75 1,42.75 2.939,42.75 2.939,37.5 9.25,37.5 9.25,34.5 5.25,34.5 5.25,32.75
NetC4_2 on SIG 1 "NETC4_2_L01_P020" (solid, pour order 20): 3.25,32.5 3.25,28 15.5,28 15.5,30.75 10.25,30.75 10.25,32.5
"3V3 LED" on SIG 1 "3V3_LED_L01_P011" (solid, pour order 11): 64.5,17 64.5,7.5 68,7.5 68,5.5 62,5.5 62,14.5 58.55,14.5 58.55,17
GND on SIG 1 "GND_L01_P053" (solid, pour order 53): 31.515,39.985 28.25,43.25 31.875,46.875 35.108,43.642
VBUS on SIG 1 "VBUS_L01_P021" (solid, pour order 21): 13.5,28 13.5,24.5 10.25,24.5 10.25,25.5 10.25,28
GND on SIG 1 "GND_L01_P050" (solid, pour order 50): 38.5,16 38.5,14.25 43,14.25 43,16
2V8 on SIG 1 "2V8_L01_P048" (solid, pour order 48): 18,37 18,39 13.75,39 13.75,37
GND on SIG 1 "GND_L01_P046" (solid, pour order 46): 1,42.75 1,45.5 5,45.5 5,42.75
GND on SIG 1 "GND_L01_P045" (solid, pour order 45): 12,23 12,18.5 14.25,18.5 14.25,23
GND on SIG 1 "GND_L01_P044" (solid, pour order 44): 26.25,36.25 24.75,34.75 26.75,32.75 27.25,32.75 28.5,34
GND on SIG 1 "GND_L01_P041" (solid, pour order 41): 46.875,50.375 50.125,47.125 51.25,48.25 48,51.5
GND on SIG 1 "GND_L01_P040" (solid, pour order 40): 52.25,46 54.25,44 55.25,45 53.25,47
1V8 on SIG 1 "1V8_L01_P037" (solid, pour order 37): 14,34 14,32.25 16.75,32.25 16.75,34
GND on SIG 1 "GND_L01_P010" (solid, pour order 10): 57.071,16.35 54.571,16.35 54.571,12.95 57.071,12.95
GND on GND 2 "GND_L05_P024" (solid, pour order 24): 2,68 0,66 0,2 2,0 88,0 90,2 90,66 88,68
GND on GND 2 "GND_L05_P015" (solid, pour order 15): 2.5,67.5 0,65.5 0,2 2.5,0 87.5,0 90,2 90,65.5 87.5,67.5
3V3 on PWR "3V3_L04_P055" (solid, pour order 55): 2.5,68.5 0,66 0,2 2,0 88,0 90,2 90,66 88,68
VDDCORE on PWR "VDDCORE_L04_P049" (solid, pour order 49): 37.5,13 37.5,16.5 37,17 34.75,17 34.5,17.25 34.5,18.5 35,19 38,19 38.5,19.5 38.5,36.5 37,38 37,40 44.5,47.5 48,47.5 49,46.5 49,46 48.5,45.5 48,45.5 45.5,45.5 40.5,40.5 40.5,19.75 41.5,18.75 41.5,17.5 41,17 40.5,17 40,16.5 40,13 39.5,12.5 38,12.5
2V8 on PWR "2V8_L04_P036" (solid, pour order 36): 13.75,37 13.75,39 18,39 18,37
1V8 on PWR "1V8_L04_P035" (solid, pour order 35): 28,31.5 31.25,34.75 31.25,36.25 28,39.5 27.5,39.5 22.75,39.5 22,38.75 22,35.25 21.125,34.375 14.875,34.375 14,33.5 14,32 14.5,31.5
1V8 on SIG 3 "1V8_L06_P038" (solid, pour order 38): 16.25,32.25 14.25,32.25 14.25,33.75 16.25,33.75
GND on GND 1 "GND_L02_P026" (solid, pour order 26): 1.895,67.928 -0.105,65.928 -0.105,1.928 1.895,-0.072 87.895,-0.071 89.895,1.929 89.895,65.928 87.895,67.928

## Silkscreen, mask and mechanical layers (free items; w line width, h text height)
Top Overlay:
  drawing of 188 lines, arcs and shapes, not listed
  text "BOOT0" at 33.046,62.525 h3
  text "TRIG" at 44.192,62.525 h3
  text "IT'S HABBENING" at 59.254,60 h1
  text "6    5" at 75.75,59.512 h1.5
  text "VTMH" at 15.3,58.4 h1.5 r90
  text "VTMH" at 83.1,55.3 h1.5 r90
  text "LONG TERM MEMORY GOES HERE" at 57.258,55 h2
  text "3V3" at 5.835,54 h1.5
  text "CLK" at 81.841,53.017 h2
  text "2V8" at 5.827,51.5 h1.5
  text "LSE" at 39.262,51.012 h2 r315
  text "IO" at 83.451,50.517 h2
  text "1V8" at 5.835,49 h1.5
  text "POWER" at 2.233,48 h2 r90
  text "RST" at 14.475,46.497 h3 r90
  text "ST-LINK" at 82,46.25 h2
  text "ON/OFF" at 5.75,46.017 h2
  text "10  1" at 75.75,45.512 h1.5
  text "uSD CARD" at 57.141,44.025 h3
  text "NEURALYZER GOES HERE" at 15.082,44 h0.7
  text "HSE" at 28.738,44.012 h2 r45
  text "36" at 80.5,41.008 h1
  text "SENSOR RESET" at 18.283,31.75 h1.5
  text "RST+" at 18.861,30.508 h1
  text "RST-" at 18.961,28.508 h1
  text "TO SENSOR" at 80.983,28 h2 r90
  text "BRAIN GOES HERE" at 37.752,27 h6
  text "C2Sv0.1" at 63.5,25 h4
  text "EYES GO HERE" at 86,23.593 h3 r90
  text "1" at 80.5,23.5 h1
  text "PROCESSOR" at 63.5,23 h2.5
  text "AN ADCS PROJECT" at 63.5,21 h1.5
  text "NOVEMBER 2025" at 63.5,19.5 h1.5
  text "VTMH" at 15.4,19.4 h1.5 r90
  text "VTMH" at 79.25,18 h1.5
  text "QUADSPI" at 17.764,16.171 h3
  text "5V / SUPPLY" at 9.543,15 h1.5
  text "PIN / 97" at 70.49,15 h1
  text "USART1 / TX" at 79,15 h1
  text "I2C4*" at 11.484,12.75 h1.5
  text "PIN / 85" at 70.398,12.5 h1
  text "USART1 / RX" at 79,12.5 h1
  text "SCL" at 12.763,11 h1.5
  text "PIN / 84" at 70.398,10 h1
  text "USART2 / RX" at 79,10 h1
  text "AR0" at 44.352,9.54 h2
  text "DGB" at 59,9.521 h2
  text "SDA" at 12.613,9 h1.5
  text "USART2 / TX" at 79,8 h1
  text "VOICE BOX GOES HERE" at 26.576,7.5 h1
  text "PIN / 81" at 70.398,7.5 h1
  text "3V3" at 60,7.27 h2
  text "U5G" at 44.352,7.04 h2
  text "3V3" at 12.835,6.5 h1.5
  text "I2C2 / SDA" at 70.819,5 h1
  text "SPI / MOSI" at 79,5 h1
  text "2V8" at 60,4.77 h2
  text "RX" at 44.352,4.519 h2
  text "GND" at 12.495,4 h1.5
  text "ON /  /  /  / OFF" at 67,4 h1.5
  text "BUZZER" at 21.475,3.234 h3 r90
  text "I2C2 / SCL" at 70.819,2.5 h1
  text "SPI / CLK" at 79,2.5 h1
  text "DISPLAY" at 11.975,2.441 h3 r90
  text "1V8" at 60,2.27 h2
  text "TX" at 44.352,2.019 h2
Board Shape:
  lines w0.1: 0,26.171 0,66 2,68 88,68 90,66 90,2 88,0 2,0 0,2 0,15.829 0.421,16.25 2.2,16.25 2.5,16.25 3.05,16.8 4.3,16.8 5,16.1 6.8,16.1 7.3,16.6 7.9,16.6 7.9,25.4 7.3,25.4 6.8,25.9 5,25.9 4.3,25.2 3.1,25.2 2.55,25.75 2.2,25.75 0.45,25.75 0.029,26.171

## Text inside footprints (layer, text, board x,y; h text height)
D3: Top Assembly "+" at 58.267,8.308 h0.5
D4: Top Assembly "+" at 58.267,3.308 h0.5
D5: Top Assembly "+" at 58.267,5.808 h0.5
D9: Top Assembly "+" at 58.267,10.808 h0.5